# Altium PCB Flight_Controller - 副本.PcbDoc
Units mm, origin at the board's own origin, x right, y up, seen from the top; angles counter-clockwise.
Board outline 152.4 x 101.6 mm, 2 copper layers (Top Layer, Bottom Layer); 58 components, 83 nets, 268 pads, 0 vias.
Unrouted connection lines stored in the file: 180.
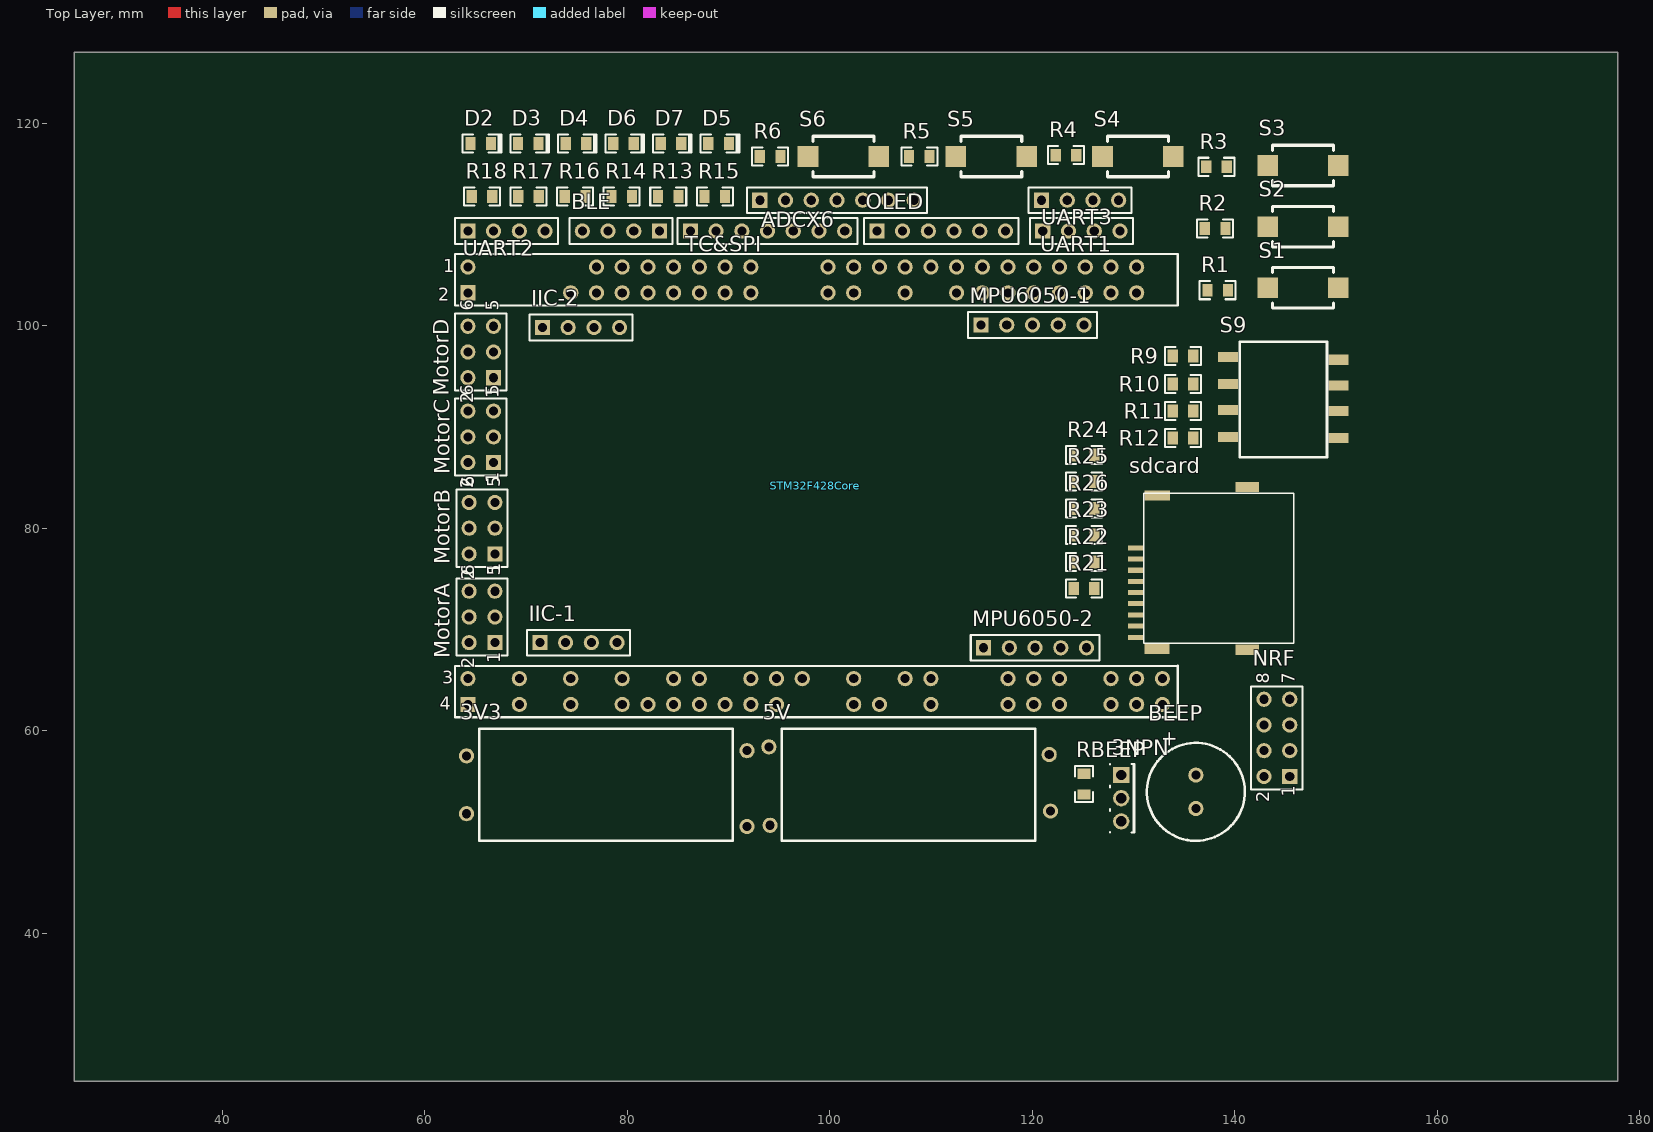
[diagram p0: Top Layer view]
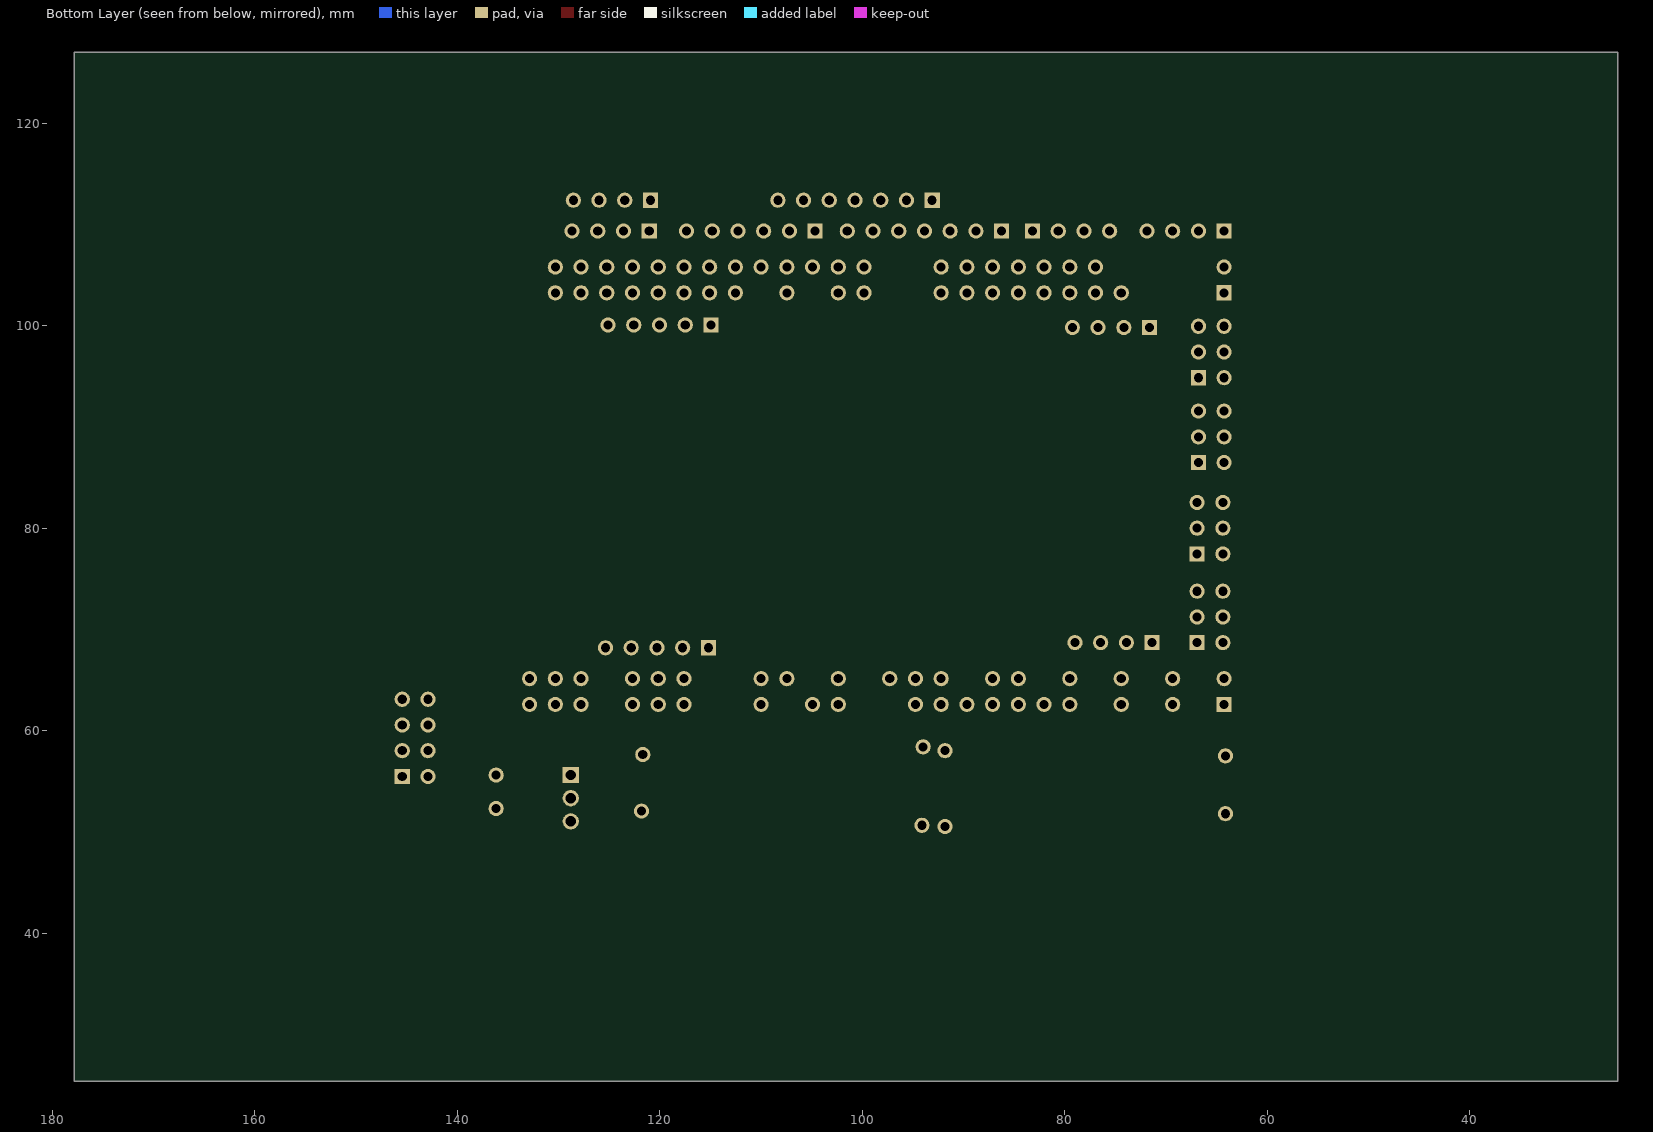
[diagram p1: Bottom Layer view, seen from below]

## Layer stack, top to bottom
Top Solder: solder mask 0.0102, Solder Resist, Dk 3.5
Top Layer: signal copper 0.0356
Dielectric 1: dielectric 0.32, FR-4, Dk 4.8
Bottom Layer: signal copper 0.0356
Bottom Solder: solder mask 0.0102, Solder Resist, Dk 3.5

## Board outline
25.4,25.4 177.8,25.4 177.8,127 25.4,127

## Design rules (kind name [scope] priority, off if disabled: settings)
Clearance [All] p1: gap=0.254
PolygonConnect [All] p1: connectstyle=Relief reliefconductorwidth=0.254 reliefentries=4 polygonreliefangle="90 Angle" airgapwidth=0.254
RoomDefinition Flight_Controller [InComponentClass('Flight_Controller')] p1: confinementstyle=ConfineIn formatcopy=TRUE lockcomponents=FALSE outline 213.106,13.335 706.12,13.335 706.12,167.005 213.106,167.005
RoutingVias [All] p1: holewidth=0.711 width=1.27 viastyle="Through Hole" minholewidth=0.711 minwidth=1.27 maxholewidth=0.711 maxwidth=1.27
SolderMaskExpansion [All] p1: expansion=0.102
Width [All] p1: maxlimit=0.254 minlimit=0.254 preferedwidth=0.254
30 further rules are at their usual default settings.

## Components (designator, comment, footprint, x,y, rotation, side; value= is the part's Value field where it differs from the comment)
3NPN "NPN" 3NPN 128.778,53.346 r270 top
3V3 "AMS1117-3.3-Board" AMS1117-3.3-Board 90.424,60.198 r180 top
5V "AMS1117-5" "AMS1117-5-Board - duplicate" 95.25,49.149 r0 top
ADCX6 "HDR1X7" HDR1X7 100.838,115.57 r0 top
BEEP "BEEP-9.5X5.5" BUZZER 136.144,56.642 r270 top
BLE "HDR1X4" HDR1X4 79.756,109.982 r180 top
D2 "LED0" 0805LED 65.532,117.856 r0 top
D3 "LED0" 0805LED 70.231,117.856 r0 top
D4 "LED0" 0805LED 74.93,117.856 r0 top
D5 "LED0" 0805LED 89.027,117.856 r0 top
D6 "LED0" 0805LED 79.629,117.856 r0 top
D7 "LED0" 0805LED 84.328,117.856 r0 top
IIC-1 "HDR1X4" HDR1X4 74.803,68.072 r0 top
IIC-2 "HDR1X4" HDR1X4 75.057,99.187 r0 top
MotorA "Header 3X2H" HDR2X3 65.786,71.247 r90 top
MotorB "Header 3X2H" HDR2X3 65.786,80.01 r90 top
MotorC "Header 3X2H" HDR2X3 65.659,89.027 r90 top
MotorD "Header 3X2H" HDR2X3 65.659,97.409 r90 top
MPU6050-1 "HDR1X5" HDR1X5 118.745,102.743 r0 top
MPU6050-2 "HDR1X5" HDR1X5 118.999,70.866 r0 top
NRF "HDR2X4" HDR2X4 144.145,59.309 r90 top
OLED "HDR1X6" HDR1X6 104.648,109.347 r0 top
R1 "Res2" 0805 138.557,103.505 r180 top
R2 "Res2" 0805 138.303,109.601 r180 top
R3 "Res2" 0805 138.43,115.697 r180 top
R4 "Res2" 0805 123.571,116.84 r180 top
R5 "Res2" 0805 109.093,116.713 r180 top
R6 "Res2" 0805 94.361,116.713 r180 top
R9 "Res2" 0805 135.128,97.028 r180 top
R10 "Res2" 0805 135.128,94.234 r180 top
R11 "Res2" 0805 135.128,91.567 r180 top
R12 "Res2" 0805 135.128,88.9 r180 top
R13 "470" 0805 83.795,112.776 r0 top
R14 "470" 0805 79.197,112.776 r0 top
R15 "470" 0805 88.392,112.776 r0 top
R16 "470" 0805 74.6,112.776 r0 top
R17 "470" 0805 70.002,112.776 r0 top
R18 "470" 0805 65.405,112.776 r0 top
R21 "10K" 0805 125.349,74.041 r180 top
R22 "10K" 0805 125.349,76.683 r180 top
R23 "10K" 0805 125.349,79.324 r180 top
R24 "10K" 0805 124.841,87.249 r0 top
R25 "10K" 0805 124.841,84.607 r0 top
R26 "10K" 0805 124.841,81.966 r0 top
RBEEP "Res2" 0805 125.095,54.991 r270 top
S1 "SW-PB" Button 146.598,103.759 r180 top
S2 "SW-PB" Button 146.598,109.791 r180 top
S3 "SW-PB" Button 146.598,115.824 r180 top
S4 "SW-PB" Button 130.302,116.713 r180 top
S5 "SW-PB" Button 115.824,116.713 r180 top
S6 "SW-PB" Button 101.219,116.713 r180 top
S9 "SW DIP-4" bmkgtp 146.431,91.186 r180 top
sdcard "SD_Card" SD_Card 137.922,83.439 r90 top
STM32F428Core "STM32F428Core" F429 63.5,62.357 r0 top
TC&SPI "HDR1X7" HDR1X7 93.98,112.522 r0 top
UART1 "HDR1X4" HDR1X4 124.46,108.712 r0 top
UART2 "HDR1X4" HDR1X4 67.691,108.712 r0 top
UART3 "HDR1X4" HDR1X4 124.333,111.76 r0 top

## Footprints (in the part's own frame and the unit in brackets; to place one, negate y for a bottom-side part, rotate by r counter-clockwise, add the part's x,y. Pads: shape width x height; smd on the part's side, far side on the other; paste and mask are expansions set on the pad)
3NPN [mm] "TO, Thru-Hole, Vertical, Heatsink Mounted; 3 In-Line Leads; Pitch 2.28 mm"
  round 1.6 hole 1: 1(0,0) 3(2.28,0)
  rect 1.6x1.6 hole 1: 2(-2.28,0)
  silkscreen extent -3.4,-1.1 3.4,1.3
0805 [mil] "0805"
  rect 40x50 smd: 1(-30,0) 2(50,0)
  silkscreen extent -60,-35 80,35
0805LED [mil] "0805LED"
  rect 40x50 smd: 1(-40,5) 2(40,5)
  silkscreen extent -70,-30 80,40
AMS1117-3.3-Board [mm] "AMS1117-3.3-Board"
  round 1.5 hole 0.9: GND(-1.397,9.652) GND(26.289,2.667) VIN+(-1.397,2.159) VOUT+(26.289,8.382)
  silkscreen extent 0,0 25.02,11.05
"AMS1117-5-Board - duplicate" [mm] "AMS1117-5-Board"
  round 1.5 hole 0.9: GND(-1.143,1.524) GND(26.543,2.921) VIN+(-1.27,9.271) VOUT+(26.416,8.509)
  silkscreen extent 0,0 25.02,11.05
bmkgtp [mm]
  rect 2x1 smd: 1(-3.81,2.286) 2(-3.81,-0.381) 3(-3.81,-2.921) 4(-3.81,-5.461) 5(7.112,-5.715) 6(7.112,-3.048) 7(7.112,-0.508) 8(7.112,2.159)
  silkscreen extent -2.67,-7.24 5.97,4.19
Button [mil] "Button"
  rect 80x80 smd: 1(-142.8,0) 2(132.8,0)
  silkscreen extent -123,-79 113,79
BUZZER [mm] "BUZZER"
  round 1.5 hole 0.9: 1(1.016,0) 2(4.318,0)
  silkscreen extent -2.16,-4.83 7.5,4.83
F429 [mm] "STM32F429Core"
  round 1.5 hole 0.9: 1(0.762,43.434) 6(13.462,43.434) 7(16.002,43.434) 8(18.542,43.434) 9(21.082,43.434) 10(23.622,43.434) 11(26.162,43.434) 12(28.702,43.434) 15(36.322,43.434) 16(38.862,43.434) 17(41.402,43.434) 18(43.942,43.434) 19(46.482,43.434) 20(49.022,43.434) 21(51.562,43.434) 22(54.102,43.434) 23(56.642,43.434) 24(59.182,43.434) 25(61.722,43.434) 26(64.262,43.434) 27(66.802,43.434) 33(10.922,40.894) 34(13.462,40.894) 35(16.002,40.894) 36(18.542,40.894) 37(21.082,40.894) 38(23.622,40.894) 39(26.162,40.894) 40(28.702,40.894) 43(36.322,40.894) 44(38.862,40.894) 46(43.942,40.894) 48(49.022,40.894) 49(51.562,40.894) 50(54.102,40.894) 51(56.642,40.894) 52(59.182,40.894) 53(61.722,40.894) 54(64.262,40.894) 55(66.802,40.894) 57(0.762,2.794) 59(5.842,2.794) 61(10.922,2.794) 63(16.002,2.794) 65(21.082,2.794) 66(23.622,2.794) 68(28.702,2.794) 69(31.242,2.794) 70(33.782,2.794) 72(38.862,2.794) 74(43.942,2.794) 75(46.482,2.794) 78(54.102,2.794) 79(56.642,2.794) 80(59.182,2.794) 82(64.262,2.794) 83(66.802,2.794) 84(69.342,2.794) 87(5.842,0.254) 89(10.922,0.254) 91(16.002,0.254) 92(18.542,0.254) 93(21.082,0.254) 94(23.622,0.254) 95(26.162,0.254) 96(28.702,0.254) 97(31.242,0.254) 100(38.862,0.254) 101(41.402,0.254) 103(46.482,0.254) 106(54.102,0.254) 107(56.642,0.254) 108(59.182,0.254) 110(64.262,0.254) 111(66.802,0.254) 112(69.342,0.254)
  rect 1.5x1.5 hole 0.9: 29(0.762,40.894) 85(0.762,0.254)
  silkscreen extent -0.51,-1.02 70.87,44.7
HDR1X4 [mm] "HDR1X4"
  rect 1.5x1.5 hole 0.9: 1(-3.429,0.635)
  round 1.5 hole 0.9: 2(-0.889,0.635) 3(1.651,0.635) 4(4.191,0.635)
  silkscreen extent -4.7,-0.64 5.46,1.91
HDR1X5 [mm] "HDR1X5"
  rect 1.5x1.5 hole 0.9: 1(-3.81,-2.667)
  round 1.5 hole 0.9: 2(-1.27,-2.667) 3(1.27,-2.667) 4(3.81,-2.667) 5(6.35,-2.667)
  silkscreen extent -5.08,-3.94 7.62,-1.4
HDR1X6 [mm] "Connector; Header; 6 Position"
  rect 1.5x1.5 hole 0.9: 1(0,0)
  round 1.5 hole 0.9: 2(2.54,0) 3(5.08,0) 4(7.62,0) 5(10.16,0) 6(12.7,0)
  silkscreen extent -1.27,-1.27 13.97,1.27
HDR1X7 [mm] "HDR1X7"
  rect 1.5x1.5 hole 0.9: 1(-7.747,-3.175)
  round 1.5 hole 0.9: 2(-5.207,-3.175) 3(-2.667,-3.175) 4(-0.127,-3.175) 5(2.413,-3.175) 6(4.953,-3.175) 7(7.493,-3.175)
  silkscreen extent -9.02,-4.44 8.76,-1.91
HDR2X3 [mm]
  rect 1.5x1.5 hole 0.9: 1(-2.54,-1.143)
  round 1.5 hole 0.9: 2(-2.54,1.397) 3(0,-1.143) 4(0,1.397) 5(2.54,-1.143) 6(2.54,1.397)
  silkscreen extent -3.81,-2.41 3.81,2.67
HDR2X4 [mm] "HDR2X4"
  rect 1.5x1.5 hole 0.9: 1(-3.81,-1.27)
  round 1.5 hole 0.9: 2(-3.81,1.27) 3(-1.27,-1.27) 4(-1.27,1.27) 5(1.27,-1.27) 6(1.27,1.27) 7(3.81,-1.27) 8(3.81,1.27)
  silkscreen extent -5.08,-2.54 5.08,2.54
SD_Card [mm] "SD_Card"
  rect 0.5x1.5 smd: 1(-5.381,7.747) 2(-6.481,7.747) 3(-7.581,7.747) 4(-8.681,7.747) 5(-9.781,7.747) 6(-10.881,7.747) 7(-11.981,7.747) 8(-13.081,7.747) 13(-14.224,7.747)
  rect 1x2.5 smd: 9(-15.356,5.622) 10(-0.206,5.597)
  rect 1x2.36 smd: 11(-15.431,-3.303) 12(0.644,-3.303)
  silkscreen extent -14.78,-7.9 0.02,6.94

## Part data
3NPN: library part 3NPN
D2 D3 D4 D5 D6 D7: "Typical INFRARED GaAs LED"
MotorA MotorB MotorC MotorD: "Header, 3-Pin, Dual row, Right Angle"
R1 R2 R3 R4 R5 R6 R9 R10 R11 R12 RBEEP: "Resistor"
R13 R14 R15 R16 R17 R18 R21 R22 R23 R24 R25 R26: library part res
S1 S2 S3 S4 S5 S6: "Switch"
S9: "DIP Switch, 4 Position, SPST"

## Nets (pads, with @x,y where several pads share a name; then routed paths per layer and width w, separated by ;. In a path a pad name is that pad's centre, name@x,y a point inside that pad or via, vN(x,y) a via of type N, cw(c..) or ccw(c..) an arc to the next point about the centre after c; other vN are vias at no path point)
3V3: 3V3.VOUT+ IIC-1.1 IIC-2.1 MPU6050-1.1 MPU6050-2.1 NRF.2 OLED.2 R1.2 R2.2 R3.2 R4.2 R5.2 R6.2 R9.2 R10.2 R11.2 R12.2 R13.2 R14.2 R15.2 R16.2 R17.2 R18.2 R21.2 R22.2 R23.2 R24.1 R25.1 R26.1 sdcard.4
5V: 5V.VOUT+ BEEP.1 BLE.4 MotorA.3 MotorA.4 MotorB.3 MotorB.4 MotorC.3 MotorC.4 MotorD.3 MotorD.4 STM32F428Core.57 STM32F428Core.85 TC&SPI.2 UART1.1 UART2.1 UART3.1
GND: 3NPN.2 3V3.GND 5V.GND ADCX6.1 BLE.3 IIC-1.2 IIC-2.2 MotorA.1 MotorA.2 MotorB.1 MotorB.2 MotorC.1 MotorC.2 MotorD.1 MotorD.2 MPU6050-1.2 MPU6050-2.2 NRF.1 OLED.1 S1.1 S2.1 S3.1 S4.1 S5.1 S6.1 S9.1 S9.2 S9.3 S9.4 sdcard.6 STM32F428Core.1 STM32F428Core.29 STM32F428Core.59 STM32F428Core.87 TC&SPI.1 UART1.2 UART2.2 UART3.2
Net3NPN_1: 3NPN.1 RBEEP.2
Net3NPN_3: 3NPN.3 BEEP.2
NetD2_1: D2.1 R18.1
NetD3_1: D3.1 R17.1
NetD4_1: D4.1 R16.1
NetD5_1: D5.1 R15.1
NetD6_1: D6.1 R14.1
NetD7_1: D7.1 R13.1
PA2: MotorA.5 STM32F428Core.38
PA3: MotorA.6 STM32F428Core.97
PA5_SCK: NRF.5 STM32F428Core.80
PA6_MISO: NRF.7 STM32F428Core.19
PA7_MOSI: NRF.6 STM32F428Core.10
PA8_CS: STM32F428Core.20 TC&SPI.7
PA9_TX: STM32F428Core.61 UART1.3
PA10_RX: STM32F428Core.89 UART1.4
PB0_SCL: IIC-1.3 STM32F428Core.106
PB5: R21.1 sdcard.13 STM32F428Core.53
PB6: MotorC.5 STM32F428Core.16
PB7: MotorC.6 STM32F428Core.44
PB8: MotorD.5 STM32F428Core.68
PB9: MotorD.6 STM32F428Core.96
PB10_TX: STM32F428Core.25 UART3.3
PB11_RX: STM32F428Core.12 UART3.4
PB12_NSS: STM32F428Core.35 TC&SPI.3
PB13_SCK: STM32F428Core.55 TC&SPI.4
PB14_MISO: STM32F428Core.15 TC&SPI.5
PB15_MOSI: STM32F428Core.43 TC&SPI.6
PC0: ADCX6.2 STM32F428Core.33
PC1: ADCX6.3 STM32F428Core.39
PC2: ADCX6.4 STM32F428Core.36
PC3: ADCX6.5 STM32F428Core.54
PC4: ADCX6.6 STM32F428Core.9
PC5: ADCX6.7 STM32F428Core.37
PC6_TX: BLE.1 STM32F428Core.8
PC7_RX: BLE.2 STM32F428Core.72
PC8: R23.1 sdcard.7 STM32F428Core.84
PC9: R22.1 sdcard.8 STM32F428Core.112
PC10: R24.2 sdcard.1 STM32F428Core.82
PC11: R25.2 sdcard.2 STM32F428Core.110
PC12: sdcard.5 STM32F428Core.111
PD2: R26.2 sdcard.3 STM32F428Core.83
PD4_D0: OLED.3 STM32F428Core.65
PD5_TX: STM32F428Core.34 UART2.3
PD6_RX: STM32F428Core.70 UART2.4
PD7_D1: OLED.4 STM32F428Core.93
PD11: RBEEP.1 STM32F428Core.6
PD13_RES: OLED.5 STM32F428Core.92
PE2_INT: MPU6050-1.5 STM32F428Core.52
PE3_INT: MPU6050-2.5 STM32F428Core.24
PE5: MotorB.5 STM32F428Core.75
PE6: MotorB.6 STM32F428Core.103
PF10_DC: OLED.6 STM32F428Core.94
PG2_IRQ: NRF.8 STM32F428Core.21
PG3_CS: NRF.4 STM32F428Core.22
PG9_CE: NRF.3 STM32F428Core.27
PH2_SCL: MPU6050-2.3 STM32F428Core.79
PH3_SDA: IIC-1.4 STM32F428Core.107
PH4_SCL: MPU6050-1.3 STM32F428Core.91
PH5_SDA: MPU6050-1.4 STM32F428Core.63
PH8_SDA: MPU6050-2.4 STM32F428Core.78
PH9: R1.1 S1.2 STM32F428Core.23
PH10: R2.1 S2.2 STM32F428Core.51
PH11: R3.1 S3.2 STM32F428Core.50
PH12: R4.1 S4.2 STM32F428Core.49
PH13: R5.1 S5.2 STM32F428Core.74
PH14: R6.1 S6.2 STM32F428Core.48
PI0: R9.1 S9.5 STM32F428Core.101
PI1: R10.1 S9.6 STM32F428Core.40
PI2: R11.1 S9.7 STM32F428Core.100
PI3: R12.1 S9.8 STM32F428Core.7
PI4: D7.2 STM32F428Core.69
PI5: D6.2 STM32F428Core.18
PI6: D5.2 STM32F428Core.46
PI7: D4.2 STM32F428Core.17
PI8: D3.2 STM32F428Core.26
PI9: D2.2 STM32F428Core.66
PI10_SCL: IIC-2.3 STM32F428Core.95
PI11_SDA: IIC-2.4 STM32F428Core.108
VIN_RAW: 3V3.VIN+ 5V.VIN+
pads on no net: sdcard.9 sdcard.10 sdcard.11 sdcard.12 STM32F428Core.11

## Text inside footprints (layer, text, board x,y; h text height)
BEEP: Top Overlay "+" at 132.944,60.071 h1.5 r270
MotorA: Top Overlay "1" at 67.437,66.675 h1.27 r90; Top Overlay "2" at 64.897,66.167 h1.27 r90; Top Overlay "5" at 67.437,75.311 h1.27 r90; Top Overlay "6" at 64.897,75.311 h1.27 r90
MotorB: Top Overlay "1" at 67.437,75.438 h1.27 r90; Top Overlay "2" at 64.897,74.93 h1.27 r90; Top Overlay "5" at 67.437,84.074 h1.27 r90; Top Overlay "6" at 64.897,84.074 h1.27 r90
MotorC: Top Overlay "1" at 67.31,84.455 h1.27 r90; Top Overlay "2" at 64.77,83.947 h1.27 r90; Top Overlay "5" at 67.31,93.091 h1.27 r90; Top Overlay "6" at 64.77,93.091 h1.27 r90
MotorD: Top Overlay "1" at 67.31,92.837 h1.27 r90; Top Overlay "2" at 64.77,92.329 h1.27 r90; Top Overlay "5" at 67.31,101.473 h1.27 r90; Top Overlay "6" at 64.77,101.473 h1.27 r90
NRF: Top Overlay "2" at 143.383,52.959 h1.27 r90; Top Overlay "1" at 145.923,53.467 h1.27 r90; Top Overlay "7" at 145.923,64.643 h1.27 r90; Top Overlay "8" at 143.383,64.643 h1.27 r90
STM32F428Core: Top Overlay "1" at 61.849,105.283 h1.27; Top Overlay "4" at 61.468,62.103 h1.27; Top Overlay "3" at 61.722,64.643 h1.27; Top Overlay "2" at 61.341,102.489 h1.27